# Altium PCB Fly_2_0425p1.PcbDoc (part 2 of 2)
Units mil, origin at the board's own origin, x right, y up, seen from the top; angles counter-clockwise.
Board outline 6426 x 1969.5 mil, 4 copper layers (TOP, GND02, PWR03, BOTTOM), stack 28.8 mil thick; 153 components, 128 nets, 741 pads, 411 vias.
Unrouted connection lines stored in the file: 3.
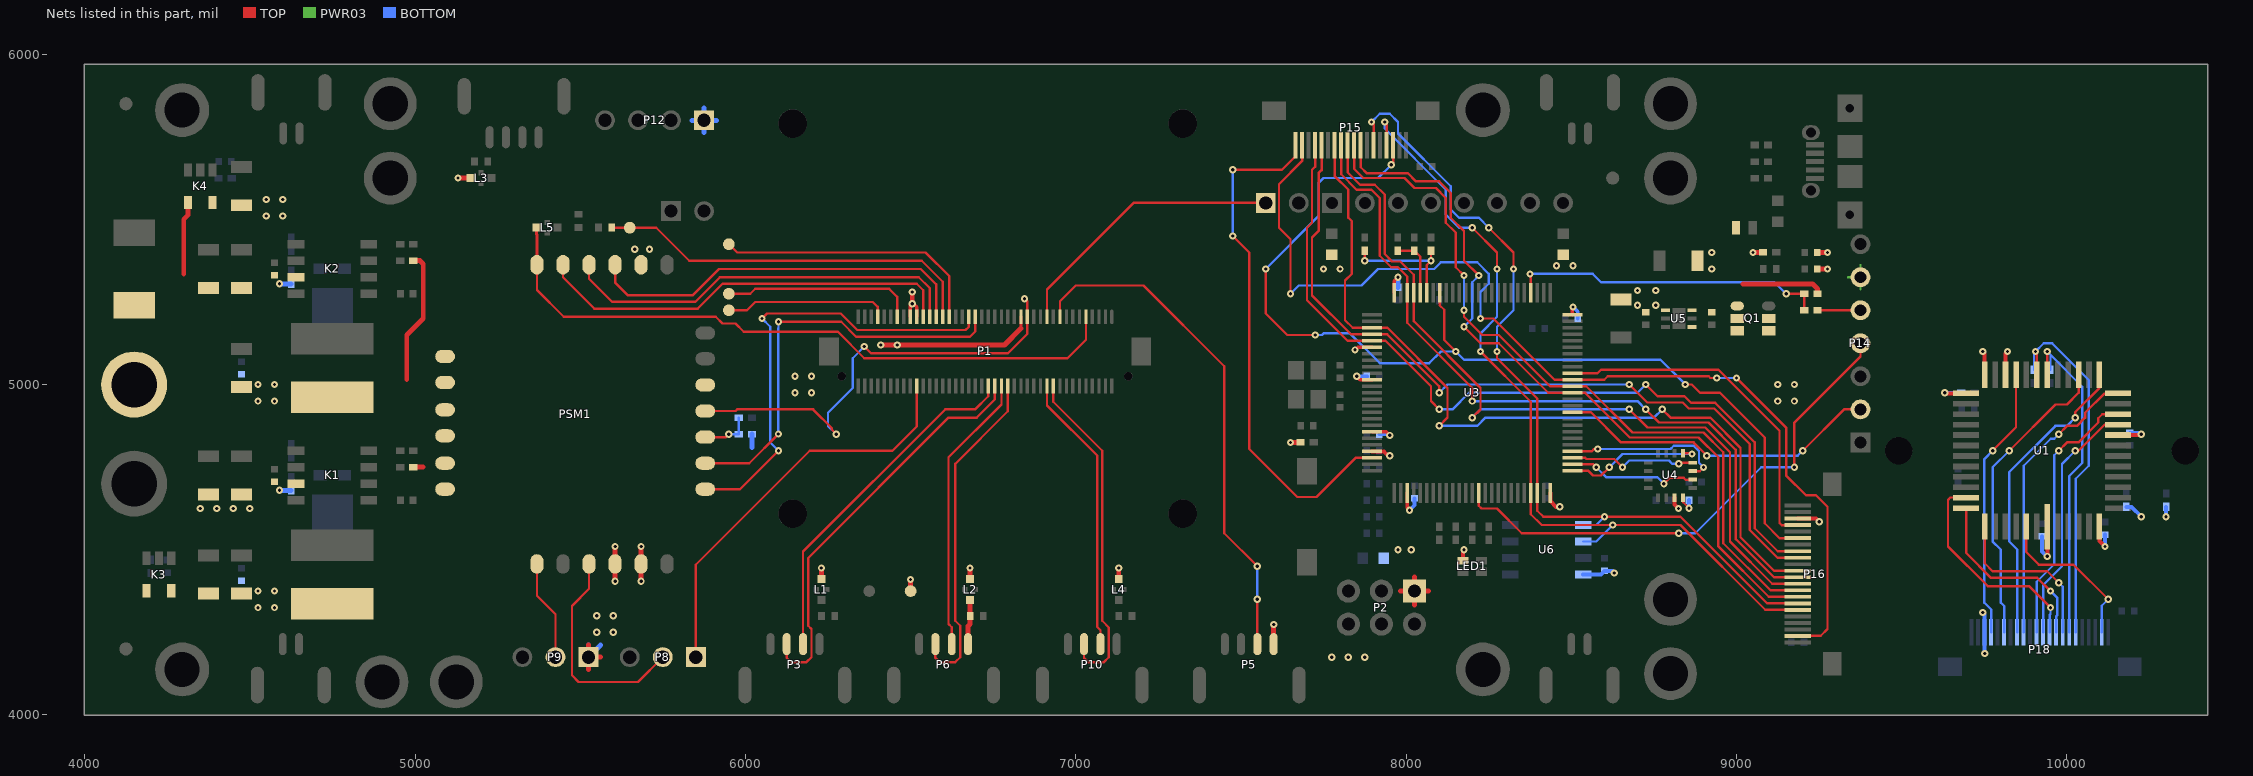
[diagram p4: the nets of this part, all layers, seen from the top]

## Via types
v1: diameter 22, hole 10, TOP to BOTTOM, 411 vias

## Nets (pads, with @x,y where several pads share a name; then routed paths per layer and width w, separated by ;. In a path a pad name is that pad's centre, name@x,y a point inside that pad or via, vN(x,y) a via of type N, cw(c..) or ccw(c..) an arc to the next point about the centre after c; other vN are vias at no path point) (continued)
PB7_DCMI_VSYNC: P15.3 P16.17 P18.17 U1.21 U3.93 | length 3964.5
  TOP w7: v1(7575,5350) 7575,5215 7640,5150 v1(7725,5150) ; v1(7955,5665) 7960.63,5670.63 P15.3@7960.63,5725 ; U3.93@8101.57,5278.15 8101.57,5239.65 8115,5226.23 8115,5135 v1(8150,5100) ; v1(8845,5000) 8864.5,5000 8889.5,4975 8950,4975 9085,4840 9085,4580 9130.04,4534.96 P16.17@9185,4534.96 ; v1(9825,4800) 9965,4940 10000,4940 10035.24,4975.24 U1.21@10035.24,5029.92
  BOTTOM w7: v1(7575,5350) 7735,5510 7735,5610 7750,5625 7915,5625 v1(7955,5665) ; v1(7725,5150) 7745,5150 7750,5155 7830,5155 7920,5065 8070,5065 8105,5100 v1(8150,5100) 8175,5075 8770,5075 v1(8845,5000) ; P18.17@9810.04,4250 9810.04,4329.96 9800,4340 9800,4500 9775,4525 9775,4750 v1(9825,4800)
PB8_I2C1_SCL: R22.2 R30.2 U3.95 | length 362.1
  TOP w7: v1(7875,5375) R30.2@7875,5405 ; U3.95@8062.2,5278.15 8062.2,5362.2 v1(8075,5375) R22.2@8075,5405
  BOTTOM w7: v1(7875,5375) v1(8075,5375)
PB9_I2C1_SDA: R23.2 R31.2 U3.96 | length 184.1
  TOP w7: R31.2@7975,5405 R23.2@8025,5405 8042.52,5387.48 U3.96@8042.52,5278.15
PB10_I2C2_SCL: P15.4 P16.6 P18.6 R15.2 U1.25 U3.47 U6.6 | length 3672.2
  TOP w7: v1(7935,5795) 7940.94,5789.06 P15.4@7940.94,5725 ; v1(8200,5475) 8275,5400 v1(8275,5350) ; v1(8225,5100) 8377.17,4947.84 U3.47@8377.17,4671.85 8377.17,4607.84 8410,4575 v1(8625,4575) 8830,4575 9086.57,4318.43 P16.6@9185,4318.43 ; v1(9905,5100) 9909,5096 U1.25@9909,5029.92
  BOTTOM w7: v1(7935,5795) 7935,5775 8120,5590 8120,5515 8160,5475 v1(8200,5475) ; v1(8225,5100) 8225,5155 8275,5205 v1(8275,5350) ; U6.6@8535.24,4525 8575,4525 v1(8625,4575) ; R15.2@9900,5045 9900,5095 v1(9905,5100) 9930,5125 9955,5125 10065.94,5014.06 10065.94,4754.46 10026.57,4715.09 P18.6@10026.57,4250
PB11_I2C2_SDA: P15.6 P16.7 P18.7 R16.2 U1.24 U3.48 U6.5 | length 3606.4
  TOP w7: v1(7895,5795) 7901.57,5788.43 P15.6@7901.57,5725 ; v1(8250,5475) 8325,5400 v1(8325,5350) ; v1(8275,5100) 8275,5080 8396.85,4958.15 U3.48@8396.85,4671.85 8396.85,4618.35 8415.2,4600 v1(8600,4600) 8830,4600 9091.89,4338.11 P16.7@9185,4338.11 ; v1(9940,5100) 9940,5080.5 9940.75,5079.75 U1.24@9940.75,5029.92
  BOTTOM w7: v1(7895,5795) 7920,5820 7950,5820 7975,5795 7975,5760 8135,5600 8135,5530 8160,5505 8220,5505 v1(8250,5475) ; v1(8275,5100) 8275,5175 8325,5225 v1(8325,5350) ; U6.5@8535.24,4575 8575,4575 v1(8600,4600) ; v1(9940,5100) 9950,5090 ; R16.2@9950,5045 9950,5090 ; P18.7@10006.89,4250 10006.89,4723.25 10046.26,4762.62 10046.26,4993.74 9950,5090
PB12_SPI2_NSS: U3.51 U4.5 | length 421.9
  TOP w7: U3.51@8503.15,4738.78 8551.72,4738.78 8565.5,4725 8590,4725 v1(8615,4750) ; U4.5@8838.39,4791.93 8863.07,4791.93 v1(8865,4790)
  BOTTOM w7: v1(8615,4750) 8655,4790 v1(8865,4790)
PB13_SPI2_SCK: U3.52 U4.2 | length 397.5
  TOP w7: U3.52@8503.15,4758.47 8566.53,4758.47 v1(8575,4750) ; v1(8780,4700) 8797.63,4717.63 8840,4717.63 8845.43,4712.2 U4.2@8866.93,4712.2
  BOTTOM w7: v1(8575,4750) 8605,4720 8760,4720 v1(8780,4700)
PB14_SPI2_MISO: U3.53 U4.4 | length 389.3
  TOP w7: U3.53@8503.15,4778.15 8541.65,4778.15 8544.8,4775 8630,4775 v1(8655,4750) ; v1(8825,4760) 8828.39,4763.39 U4.4@8866.93,4763.39
  BOTTOM w7: v1(8655,4750) 8675,4770 8795.5,4770 8805.5,4760 v1(8825,4760)
PB15_SPI2_MOSI: U3.54 U4.3 | length 489.9
  TOP w7: U3.54@8503.15,4797.84 8561.53,4797.84 8568.7,4805 v1(8580,4805) ; U4.3@8866.93,4737.8 8888.43,4737.8 v1(8900,4749.37)
  BOTTOM w7: v1(8580,4805) 8800,4805 8810,4815 8870,4815 8886.21,4798.79 8886.21,4763.16 v1(8900,4749.37)
PC6_DCMI_D0: P15.8 P16.8 P18.8 U1.43 U3.63 | length 2852.2
  TOP w7: P15.8@7862.2,5725 7862.2,5657.8 7880,5640 8005,5640 8030,5615 8100,5615 8135,5580 8135,5505 8175,5465 8175,5375 v1(8220,5330) ; v1(8175,5175) 8225,5125 8280,5125 8430,4975 U3.63@8503.15,4975 8541.65,4975 8676.65,4840 8885,4840 8945,4780 8945,4510 9097.2,4357.8 P16.8@9185,4357.8 ; U1.43@9751,4570 9751,4459 9775,4435 9940,4435 v1(9975,4400)
  BOTTOM w7: v1(8175,5175) 8200,5200 8200,5310 v1(8220,5330) ; v1(9975,4400) 9987.2,4387.8 P18.8@9987.2,4250
PC7_DCMI_D1: P15.9 P16.9 P18.9 U1.42 U3.64 | length 2856.4
  TOP w7: P15.9@7842.52,5725 7842.52,5652.48 7870,5625 7995,5625 8025,5595 8090,5595 8120,5565 8120,5490 8150,5460 8150,5355 v1(8175,5330) ; v1(8175,5225) 8175,5205.5 8230.5,5150 8280,5150 8435.32,4994.69 U3.64@8503.15,4994.69 8545.31,4994.69 8685,4855 8900,4855 8960,4795 8960,4520 9102.52,4377.48 P16.9@9185,4377.48 ; U1.42@9695,4626 9695,4490 9770,4415 9910,4415 v1(9950,4375)
  BOTTOM w7: v1(8175,5225) v1(8175,5330) ; v1(9950,4375) 9971,4354 9971,4301.98 9967.52,4298.5 P18.9@9967.52,4250
PC8_TIM8_CH3_MASTERCLOCK: P15.17 P16.2 P18.2 U1.47 U3.65 | length 3633.4
  TOP w7: v1(7650,5275) 7650,5440 7615,5475 7615,5606.46 7685.04,5676.5 P15.17@7685.04,5725 ; v1(8225,5200) 8263.39,5200 8449.01,5014.37 U3.65@8503.15,5014.37 8599.37,5014.37 8610,5025 8915.5,5025 8920.5,5020 v1(8940,5020) ; v1(9000,5020) 9150,4870 9150,4725 9210,4665 9240,4665 9275,4630 9275,4260 9254.69,4239.69 P16.2@9185,4239.69 ; U1.47@9877,4570 9877,4493 9915,4455 10020,4455 v1(10125,4350)
  BOTTOM w7: v1(7650,5275) 7675,5300 7865,5300 7915,5350 8085,5350 8105,5370 8215,5370 8250,5335 8250,5305 8225,5280 v1(8225,5200) ; v1(8940,5020) v1(9000,5020) ; P18.2@10105.31,4250 10105.31,4330.31 v1(10125,4350)
PC9_TIM8_CH4_LED_OUT: P16.19 P18.19 U1.27 U3.66 | length 1873.1
  TOP w7: U3.66@8503.15,5034.06 8579.06,5034.06 8590,5045 8945,5045 9130,4860 9130,4580.83 9136.5,4574.33 P16.19@9185,4574.33 ; v1(9775,4800) 9846,4871 U1.27@9846,5029.92
  BOTTOM w7: P18.19@9770.67,4250 9770.67,4319.33 9750,4340 9750,4775 v1(9775,4800)
PE0_DCMI_D2: P15.10 P16.10 P18.10 U1.41 U3.97 | length 3076.5
  TOP w7: P15.10@7822.83,5725 7822.83,5642.17 7860,5605 7905,5605 7935,5575 7935,5395 7957.32,5372.68 7982.32,5372.68 8022.84,5332.16 U3.97@8022.84,5278.15 8022.84,5192.16 8225,4990 8225,4925 v1(8200,4900) ; v1(8675,4925) 8730,4870 8905,4870 8980,4795 8980,4525 9107.83,4397.17 P16.10@9185,4397.17 ; U1.41@9695,4658 9647,4658 9640,4651 9640,4510 9760,4390 9885,4390 v1(9950,4325)
  BOTTOM w7: v1(8200,4900) 8225,4925 v1(8675,4925) ; P18.10@9947.83,4250 9947.83,4303.33 9950,4305.5 v1(9950,4325)
PE1_DCMI_D3: P15.11 P16.11 P18.11 U1.15 U3.98 | length 3094.1
  TOP w7: P15.11@7803.15,5725 7803.15,5636.85 7850,5590 7895,5590 7920,5565 7920,5390 7955,5355 7975,5355 8003.15,5326.85 U3.98@8003.15,5278.15 8003.15,5186.85 8200,4990 v1(8200,4950) ; v1(8725,4925) 8765,4885 8915,4885 8997.68,4802.32 8997.68,4532.32 9113.15,4416.85 P16.11@9185,4416.85 ; v1(10025,4800) 10035,4800 10113.74,4878.74 U1.15@10154.92,4878.74
  BOTTOM w7: v1(8200,4950) 8700,4950 v1(8725,4925) ; P18.11@9928.15,4250 9928.15,4393.15 9985,4450 9985,4760 v1(10025,4800)
PE4_DCMI_D4: P15.12 P16.12 P18.12 U1.16 U3.3 | length 3357
  TOP w7: P15.12@7783.46,5725 7783.46,5631.54 7825,5590 7825,5505 7835,5495 7835,5335 7815,5315 7815,5195 7838.15,5171.85 U3.3@7896.85,5171.85 7943.15,5171.85 8125,4990 8125,4900 v1(8100,4875) ; v1(8775,4925) 8800,4900 8920,4900 9011.82,4808.18 9011.82,4538.18 9113.46,4436.54 P16.12@9185,4436.54 ; v1(9975,4800) 10000,4825 10035,4825 10095,4885 10095,4898.32 10106.92,4910.24 U1.16@10154.92,4910.24
  BOTTOM w7: v1(8100,4875) 8215,4875 8240,4900 8750,4900 v1(8775,4925) ; P18.12@9908.46,4250 9908.46,4403.46 9961.21,4456.21 9961.21,4786.21 v1(9975,4800)
PE5_DCMI_D6: P15.14 P16.14 P18.14 U1.18 U3.4 | length 3339.9
  TOP w7: P15.14@7744.09,5725 7744.09,5649.09 7735,5640 7735,5465 7715,5445 7715,5270 7832.84,5152.16 U3.4@7896.85,5152.16 7942.34,5152.16 8100,4994.5 v1(8100,4975) ; v1(8675,5000) 8729.5,4945.5 8837.38,4945.5 8855.38,4927.5 8932.5,4927.5 9040,4820 9040,4560 9124.09,4475.91 P16.14@9185,4475.91 ; v1(9975,4850) 10000,4875 10030,4875 10055,4900 10055,4915 10113.23,4973.23 U1.18@10154.92,4973.23
  BOTTOM w7: v1(8100,4975) 8125,5000 v1(8675,5000) ; P18.14@9869.09,4250 9869.09,4754.09 9951.21,4836.21 9961.21,4836.21 v1(9975,4850)
PE6_DCMI_D7: P15.15 P16.15 P18.15 U1.19 U3.5 | length 3444.2
  TOP w7: P15.15@7724.41,5725 7724.41,5659.41 7715,5650 7715,5490 7700,5475 7700,5255 7822.52,5132.48 U3.5@7896.85,5132.48 7937.52,5132.48 8075,4995 8075,4950 v1(8100,4925) ; v1(8725,5000) 8760.5,4964.5 8842.54,4964.5 8862.05,4945 8935,4945 9055,4825 9055,4565 9124.41,4495.59 P16.15@9185,4495.59 ; v1(10025,4900) 10025,4916.77 10098.23,4990 U1.19@10098.23,5029.92
  BOTTOM w7: v1(8100,4925) 8140,4925 8190,4975 8700,4975 v1(8725,5000) ; P18.15@9849.41,4250 9849.41,4500.59 9825,4525 9825,4735 9965,4875 10000,4875 v1(10025,4900)
PERIPH_5V: D2.C L2.2 P6.1 | length 136.3
  TOP w15: P6.1@6673.82,4214.57 6673.82,4268.82 6680,4275 6680,4279.18 6680.32,4279.5 D2.C@6680.32,4300 6680.32,4320.5 6680,4320.82 L2.2@6680,4348
PPM-SBUS-PROT: P1.62 P8.1 | length 1243.9
  TOP w7: P8.1@5850,4175 5850,4455 6195,4800 6445,4800 6518.31,4873.31 P1.62@6518.31,4995.67
PRESSURE_SENS_IN: P1.21 P4.1 | length 853.5
  TOP w7: P1.21@6913,5205 6913,5288 7175,5550 P4.1@7575,5550
PWDN: P15.18 U3.23 | length 1587.9
  TOP w7: v1(7475,5450) 7525,5400 7525,4805 7670,4660 7728.7,4660 7846.85,4778.15 U3.23@7896.85,4778.15 ; v1(7475,5650) 7624.35,5650 7665.35,5691.01 P15.18@7665.35,5725
  BOTTOM w7: v1(7475,5450) v1(7475,5650)
PWM: P14.2 U3.60 | length 984.1
  TOP w7: U3.60@8503.15,4915.94 8559.06,4915.94 8650,4825 8870,4825 v1(8910,4785) ; v1(9200,4800) 9325,4925 P14.2@9375,4925
  BOTTOM w7: v1(8910,4785) 9185,4785 v1(9200,4800)
RX_5V0_OUT: P8.2 PSM1.3 | length 672.9
  TOP w7: PSM1.3@5526.87,4457.09 5526.87,4381.87 5475,4330 5475,4120 5495,4100 5675,4100 P8.2@5750,4175
SAFETY: P1.17 P5.2 | length 1548.1
  TOP w7: P1.17@6952,5205 6952,5252 7000,5300 7205,5300 7449.61,5055.39 7449.61,4550 v1(7549.61,4450) ; P5.2@7549.61,4214.57 v1(7549.61,4350)
  BOTTOM w7: v1(7549.61,4350) v1(7549.61,4450)
SERIAL1_RX: P1.38 P3.3 | length 1237.1
  TOP w7: P3.3@6125,4214.57 6125,4172.57 6137.57,4160 6185,4160 6200,4175 6200,4260 6190,4270 6190,4475 6615,4900 6700,4900 6755,4955 P1.38@6755,4995.67
SERIAL1_TX: P1.40 P3.2 | length 1065.9
  TOP w7: P3.2@6174.61,4214.57 6174.61,4494.61 6605,4925 6695,4925 6735,4965 P1.40@6735,4995.67
SERIAL2_RX: P1.34 P6.3 | length 1021.2
  TOP w7: P6.3@6575,4214.57 6575,4172.57 6587.57,4160 6635,4160 6650,4175 6650,4270 6635,4285 6635,4760 6794,4919 P1.34@6794,4995.67
SERIAL2_TX: P1.36 P6.2 | length 851.4
  TOP w7: P6.2@6624.61,4214.57 6624.61,4265.39 6615,4275 6615,4780 6775,4940 P1.36@6775,4995.67
SERIAL3_RX: P1.20 P10.3 | length 1018.7
  TOP w7: P1.20@6932,4995.67 6932,4948 7080,4800 7080,4285 7100,4265 7100,4175 7085,4160 7037.57,4160 7025,4172.57 P10.3@7025,4214.57
SERIAL3_TX: P1.22 P10.2 | length 848
  TOP w7: P1.22@6913,4995.67 6913,4937 7065,4785 7065,4266.18 7074.61,4256.57 P10.2@7074.61,4214.57
SONAR_TX: P14.5 R19.2 | length 130
  TOP w7: R19.2@9245,5225 P14.5@9375,5225
SPI_EXT_MISO: P1.67 S3.1 | length 586.3
  TOP w7: S3.1@5950,5275 6015,5275 6030,5290 6435,5290 6459.25,5265.75 P1.67@6459.25,5205
SPI_EXT_MOSI: P1.51 S2.1 | length 830.1
  TOP w7: S2.1@5950,5425 5975,5400 6545,5400 6616.73,5328.27 P1.51@6616.73,5205
SPI_EXT_SCK: P1.73 S4.1 | length 497.1
  TOP w7: S4.1@5950,5225 6005,5225 6030,5250 6385.7,5250 6400.2,5235.5 P1.73@6400.2,5205
UART4_RX: R17.2 R19.1 U3.79 | length 962.6
  TOP w7: v1(8375,5335) 8377.17,5332.84 U3.79@8377.17,5278.15 ; v1(9150,5275) R17.2@9205,5275 R19.1@9205,5225
  BOTTOM w7: v1(8375,5335) 8565,5335 8590,5310 9115,5310 v1(9150,5275)
US_FN1: P14.4 U3.39 | length 1569
  TOP w7: U3.39@8219.68,4671.85 8219.68,4633.35 8228.03,4625 8275,4625 8350,4550 v1(8825,4550) ; v1(9175,4750) 9175,4885 9375,5085 P14.4@9375,5125
  BOTTOM w7: v1(8825,4550) 8875,4550 9075,4750 v1(9175,4750)
VBAT: C2.1 C3.1 C4.1 C9.1 C10.1 C11.1 K1.7 K2.7 K3.4 K4.4 P13.1 R3.1 R7.2 R11.2 | length 291
  TOP w15: 4300,5335 4300,5500 4312.6,5512.6 K4.4@4312.6,5550.79
  BOTTOM w15: v1(4590,4680) R7.2@4625,4680 ; v1(4590,5305) R11.2@4625,5305
  other v1: 4350,4625 4400,4625 4450,4625 4500,4625
VBUS: P1.29 P12.1 PSM1.11 PSM1.20 PSM1.21 | length 627.7
  TOP w10: 6834,5170 P1.29@6834,5205
  TOP w15: v1(6410,5120) v1(6460,5120) 6784,5120 6834,5170
  BOTTOM w15: 5838,5800 P12.1@5875,5800 ; 5875,5763 P12.1@5875,5800 ; 5875,5837 P12.1@5875,5800 ; 5912,5800 P12.1@5875,5800
  other v1: 6150,4975 6200,4975 6150,5025 6200,5025
VBUS_VALID: P1.59 PSM1.18 | length 1286.8
  TOP w7: PSM1.18@5448,5362.6 5448,5324.57 5542.57,5230 5855.68,5230 5930.68,5305 6518.49,5305 6537.99,5285.5 P1.59@6537.99,5205
VDD_3V3_FLOW: C17.1 C18.1 C19.1 C24.1 C25.1 C26.1 C36.1 C37.1 C40.2 C41.2 C42.2 C43.2 C44.2 C50.1 L9.2 L11.2 LED1.4 P14.6 P16.20 P18.20 R14.2 R18.2 R20.2 R25.1 R27.2 U1.1 U1.6 U1.14 U1.28 U1.30 U1.31 U3.6 U3.11 U3.19 U3.22 U3.28 U3.50 U3.75 U3.100 U4.15 U4.16 U5.1 U6.8 | length 1974.1
  TOP w7: U4.16@8838.39,4658.07 8838.39,4643.61 v1(8856,4626)
  TOP w10: v1(7845,5105) 7852.8,5112.8 U3.6@7896.85,5112.8 ; v1(7850,5025) 7850,5024.37 7860,5014.37 U3.11@7896.85,5014.37 ; U3.19@7896.85,4856.89 7939.35,4856.89 v1(7950,4846.24) ; U3.100@7963.78,5278.15 7963.78,5313.78 v1(7975,5325)
  TOP w11: U3.28@8003.15,4671.85 8003.15,4626.85 v1(8010,4620) ; U3.75@8503.15,5211.22 8503.15,5233.15 v1(8505,5235)
  TOP w12: U3.22@7896.85,4797.84 7932.16,4797.84 7945,4785 v1(7950,4785) ; LED1.4@8171.46,4466.73 8171.46,4496.46 v1(8175,4500) ; U3.50@8436.22,4671.85 8436.22,4647.35 8453.57,4630 v1(8465,4630) ; U4.15@8812.8,4658.07 8812.8,4636.57 v1(8824.37,4625) ; P16.20@9185,4594.02 9240.98,4594.02 v1(9250,4585) ; v1(9630,4975) 9631.77,4973.23 U1.31@9695,4973.23 ; v1(9745,5100) 9751,5094 U1.30@9751,5029.92 ; U1.28@9814,5029.92 9814,5094 v1(9820,5100) ; v1(9940,4480) 9940.75,4480.75 9940.75,4515.75 U1.1@9940.75,4570 ; U1.6@10098.23,4570 10098.23,4526.77 v1(10115,4510) ; U1.14@10154.92,4847.24 10222.24,4847.24 v1(10225,4850)
  TOP w15: v1(7650,4825) R25.1@7680,4825 ; v1(9050,5400) R27.2@9080,5400 ; C24.1@9244,5350 v1(9275,5350) ; C25.1@9244,5400 v1(9275,5400)
  PWR03 w7: 9338,5325 P14.6@9375,5325 ; 9375,5288 P14.6@9375,5325 ; 9375,5362 P14.6@9375,5325
  BOTTOM w11: v1(8010,4620) 8025,4635 C43.2@8025,4656 ; v1(8505,5235) 8519,5221 C42.2@8519,5200
  BOTTOM w12: v1(7850,5025) C44.2@7881,5025 ; C40.2@7919,4850 7946.24,4850 v1(7950,4846.24) ; U6.8@8535.24,4425 8589,4425 C50.1@8600,4436 8624,4436 v1(8630,4430) ; v1(8856,4626) C26.1@8856,4650 ; v1(9630,4975) R14.2@9680,4975 ; v1(9745,4310) 9750.98,4304.02 P18.20@9750.98,4250 v1(9750.98,4185.98) ; C19.1@9925,4541 9925,4495 v1(9940,4480) ; v1(10115,4510) C17.1@10115,4546 ; R18.2@10180,4630 10195,4630 v1(10225,4600) ; C18.1@10190,4854 10221,4854 v1(10225,4850) ; v1(10300,4600) R20.2@10300,4630
  BOTTOM w15: C41.2@7975,5294 v1(7975,5325)
  other v1: 7975,4500 8015,4500 8700,5240 8755,5240 8700,5285 8755,5285 8455,5360 8505,5360
VDD_3V3_USER: P9.2 PSM1.1 | length 305.3
  TOP w7: PSM1.1@5369,4457.09 5369,4361 5425,4305 P9.2@5425,4175
VDD_3V3_USER_EN: PSM1.9 R1.1 R2.2 | length 155.2
  TOP w7: PSM1.9@5878.54,4840.94 5940.94,4840.94 v1(5950,4850)
  BOTTOM w7: v1(5950,4850) R1.1@5980,4850 R2.2@5980,4900
VDD_5V_BACKUP: C14.1 C15.1 C16.1 K4.5 L7.2 PSM1.22 PSM1.23 R10.1 | length 404.9
  TOP w15: 4975,5015 4975,5150 5025,5200 5025,5365 5015,5375 R10.1@4995,5375
  other v1: 4525,4950 4575,4950 4525,5000 4575,5000 4550,5510 4600,5510 4550,5560 4600,5560
VDD_5V_BRICK: C6.1 C7.1 C8.1 K3.5 L6.2 PSM1.24 PSM1.25 R5.1 | length 30
  TOP w15: R5.1@4995,4750 5025,4750
  other v1: 4525,4325 4575,4325 4525,4375 4575,4375
VDD_5V_FLOW: C38.1 C39.1 D8.2 L10.2 Q1.4 R17.1 U5.4 U5.6 | length 246.2
  TOP w15: 9020,5305 9230,5305 9245,5290 R17.1@9245,5275
  other v1: 7750,5350 7800,5350 8925,5350 8925,5400
VDD_5V_HIPOWER: P9.1 PSM1.5 Q1.1 Q1.2 Q1.5 Q1.6 | length 305.3
  TOP w15: 5525,4138 P9.1@5525,4175 ; 5525,4212 P9.1@5525,4175 ; 5562,4175 P9.1@5525,4175 ; v1(5684.35,4405) PSM1.5@5684.35,4457.09 v1(5684.35,4510)
  BOTTOM w15: 5525,4212 P9.1@5525,4175 5562,4212
  other v1: 5550,4250 5600,4250 5550,4300 5600,4300 9125,4950 9175,4950 9125,5000 9175,5000
VDD_5V_HIPOWER_OC: P1.45 PSM1.7 | length 1377.6
  TOP w7: PSM1.7@5878.54,4683.46 5983.46,4683.46 v1(6100,4800) ; v1(6050,5200) 6065,5215 6288.28,5215 6338.28,5165 6666.29,5165 6675.79,5174.5 P1.45@6675.79,5205
  BOTTOM w7: v1(6050,5200) 6075,5175 6075,4825 v1(6100,4800)
VDD_5V_IN_PROT: P1.61 P1.63 PSM1.15 R1.2 | length 165.1
  TOP w10: P1.63@6498.62,5205 6498.62,5238.62 v1(6505,5245) 6508.31,5245 6518.31,5235 P1.61@6518.31,5205
  TOP w15: v1(6505,5245) v1(6505,5280)
  BOTTOM w15: 6020,4810 R1.2@6020,4850
  other v1: 5665,5410 5710,5410
VDD_5V_PERIPH: L1.1 L2.1 L3.1 L4.1 P2.1 P5.1 PSM1.4 S1.1 | length 506.3
  TOP w15: v1(5130,5625) L3.1@5168.5,5625 ; v1(5605.61,4405) PSM1.4@5605.61,4457.09 v1(5605.61,4510) ; L1.1@6230,4411.5 v1(6230,4445) ; S1.1@6500,4375 v1(6500,4410) ; L2.1@6680,4411.5 v1(6680,4445) ; L4.1@7130,4411.5 v1(7130,4445) ; P5.1@7598.82,4214.57 v1(7598.82,4273.82) ; 7983,4375 P2.1@8025,4375 ; 8025,4333 P2.1@8025,4375 ; 8025,4417 P2.1@8025,4375 ; 8067,4375 P2.1@8025,4375
  other v1: 7775,4175 7825,4175 7875,4175
VDD_5V_PERIPH_EN: P1.27 PSM1.10 | length 1389.1
  TOP w7: PSM1.10@5878.54,4920 5970,4920 5975,4925 6205,4925 6261.21,4868.79 6261.21,4863.79 v1(6275,4850) ; v1(6360,5115) 6380,5095 6795,5095 6853,5153 P1.27@6853,5205 6853,5252 v1(6845,5260)
  BOTTOM w7: v1(6275,4850) 6250,4875 6250,4915 6325,4990 6325,5080 v1(6360,5115)
VDD_5V_PERIPH_OC: P1.43 PSM1.8 | length 1262.7
  TOP w7: PSM1.8@5878.54,4762.2 6011.92,4762.2 v1(6099.86,4850.14) ; v1(6100,5190) 6290,5190 6335,5145 6680,5145 6695.47,5160.47 P1.43@6695.47,5205
  BOTTOM w7: v1(6099.86,4850.14) 6099.86,5170.36 6100,5170.5 v1(6100,5190)
VDD_BACKUP_VALID: P1.57 PSM1.17 | length 1233.9
  TOP w7: PSM1.17@5526.87,5362.6 5526.87,5320.3 5596.85,5250.32 5848.15,5250.32 5922.83,5325 6525,5325 6557.68,5292.32 P1.57@6557.68,5205
VDD_BRICK_VALID: P1.55 PSM1.16 | length 1192.1
  TOP w7: PSM1.16@5605.61,5362.6 5605.61,5309.39 5645,5270 5840,5270 5920,5350 6530.68,5350 6577.36,5303.32 P1.55@6577.36,5205
VDD_SERVO: D300.A P1.53 S6.1 | length 1176.3
  TOP w7: D300.A@5595,5475 S6.1@5650,5475 5730,5475 5830,5375 6533.52,5375 6597.05,5311.47 P1.53@6597.05,5205
VDD_SERVO_IN: L5.2 P1.9 PSM1.19 | length 2028.9
  TOP w7: PSM1.19@5369,5362.6 5369,5286 5450,5205 5910,5205 5930.27,5184.73 5970.27,5184.73 5995,5160 6280,5160 6360,5080 6975,5080 7031,5136 P1.9@7031,5205
  TOP w10: L5.2@5368,5475 5368,5454.5 5369,5453.5 PSM1.19@5369,5362.6
pads on no net: "P1. " "P15. " "P16. " "P18. " K1.2 K1.3 K1.5 K2.2 K2.3 K2.5 N5.GND N5.GND/2 N6.GND N6.GND/2 N7.GND N7.GND/2 N8.GND N8.GND/2 P1.2 P1.5 P1.7 P1.8 P1.10 P1.11 P1.12 P1.14 P1.16 P1.18 P1.19 P1.26 P1.30 P1.32 P1.35 P1.37 P1.42 P1.44 P1.46 P1.48 P1.50 P1.52 P1.54 P1.56 P1.58 P1.60 P1.64 P1.65 P1.66 P1.68 P1.70 P1.72 P1.75 P1.77 P1.79 P14.1 PSM1.2 U1.2 U1.3 U1.4 U1.5 U1.22 U1.26 U1.36 U1.37 U1.44 U1.45 U2.1 U2.2 U3.7 U3.8 U3.9 U3.16 U3.17 U3.18 U3.24 U3.32 U3.33 U3.34 U3.35 U3.36 U3.40 U3.41 U3.42 U3.43 U3.44 U3.45 U3.46 U3.55 U3.56 U3.57 U3.58 U3.59 U3.61 U3.62 U3.67 U3.77 U3.78 U3.80 U3.81 U3.82 U3.83 U3.84 U3.85 U3.86 U3.87 U3.88 U3.89 U3.90 U3.91 U4.6 U4.7 U5.2 U5.5 U6.7
copper on no net: | length 1109.1
  TOP w12: 4070,4175 4070,4225 4100,4255 4150,4255 4180,4225 4180,4175 4150,4145 4100,4145 4070,4175 ; 4070,5825 4070,5875 4100,5905 4150,5905 4180,5875 4180,5825 4150,5795 4100,5795 4070,5825 ; 8570,5600 8570,5650 8600,5680 8650,5680 8680,5650 8680,5600 8650,5570 8600,5570 8570,5600

## Polygon pours and split planes (outlines as drawn)
VDD_5V_PERIPH on TOP "TOP-VDD_5V_PERIPH" (solid, pour order 2): 106 vertices, not listed, extent 7735,4130 8090,4425
VDD_5V_IN_PROT on TOP "TOP-VDD_5V_IN_PROT" (solid, pour order 6): 5650,5430 5660,5440 5715,5440 5725,5430 5725,5325 5715,5315 5660,5315 5650,5325 5650,5430
VDD_5V_HIPOWER on TOP "TOP-VDD_5V_HIPOWER" (solid, pour order 10): 18 vertices, not listed, extent 5495,4120 5725,4525
VDD_5V_HIPOWER on TOP "TOP-VDD_5V_HIPOWER 1" (solid, pour order 12): 9185,4920 9130,4920 8970,5080 8970,5198.78 8981.21,5210 9021.21,5210 9026.22,5215 9130,5215 9205,5140 9205,4940 9185,4920
VDD_5V_FLOW on TOP "TOP-VDD_5V_FLOW" (solid, pour order 16): 7805,5330 7745,5330 7735,5340 7735,5405 7745,5415 7805,5415 7815,5405 7815,5340 7805,5330
VDD_5V_FLOW on TOP "TOP-VDD_5V_FLOW 1" (solid, pour order 18): 32 vertices, not listed, extent 8850,5160 9025,5495
VDD_5V_BRICK on TOP "TOP-VDD_5V_BRICK" (solid, pour order 22): 18 vertices, not listed, extent 4230,4265 5145,4795
VDD_5V_BACKUP on TOP "TOP-VDD_5V_BACKUP" (solid, pour order 26): 5050,4950 5125,4950 5140,4935 5140,4830 5125,4815 5045,4815 5035,4825 4950,4825 4900,4875 4425,4875 4400,4900 4400,5010 4415,5025 4975,5025 5050,4950
VDD_5V_BACKUP on TOP "TOP-VDD_5V_BACKUP 1" (solid, pour order 28): 4625,5570 4625,5505 4615,5495 4360,5495 4350,5505 4350,5570 4360,5580 4615,5580 4625,5570
VDD_3V3_FLOW on TOP "TOP-VDD_3V3_FLOW" (solid, pour order 34): 8445,5350 8440,5355 8440,5410 8445,5415 8520,5415 8525,5410 8525,5355 8520,5350 8445,5350
VDD_3V3_FLOW on TOP "TOP-VDD_3V3_FLOW 1" (solid, pour order 36): 8780,5300 8795,5285 8795,5225 8790,5220 8765,5220 8755,5210 8620,5210 8610,5220 8610,5285 8625,5300 8780,5300
VBUS on TOP "TOP-VBUS" (solid, pour order 42): 18 vertices, not listed, extent 5025,4925 6215,5175
VBAT on TOP "TOP-VBAT" (solid, pour order 46): 20 vertices, not listed, extent 4050,4875 4685,5345
VBAT on TOP "TOP-VBAT 1" (solid, pour order 48): 32 vertices, not listed, extent 4040,4320 4685,4905
NETL11_1 on TOP "TOP-NETL11_1" (solid, pour order 50): 8435,5585 8445,5595 8515,5595 8525,5585 8525,5450 8515,5440 8450,5440 8435,5455 8435,5585
NETJ1_1 on TOP "TOP-NETJ1_1" (solid, pour order 52): 45 vertices, not listed, extent 9085,5540 9270,5635
NETD8_1 on TOP "TOP-NETD8_1" (solid, pour order 56): 9155,5435 9045,5435 9035,5445 9035,5505 9040,5510 9155,5510 9165,5500 9165,5445 9155,5435
NETC5_2 on TOP "TOP-NETC5_2" (solid, pour order 58): 4600,4450 4575,4475 4575,4625 4610,4660 4681.21,4660 4681.22,4660 4740,4660 4800,4600 4990,4600 5000,4590 5000,4465 4985,4450 4600,4450
NETC13_2 on TOP "TOP-NETC13_2" (solid, pour order 62): 4600,5075 4575,5100 4575,5250 4610,5285 4681.21,5285 4681.22,5285 4740,5285 4800,5225 4925,5225 4940,5210 4940,5090 4925,5075 4600,5075
GND on TOP "TOP-GND" (solid, pour order 68): 4320,4465 4320,4535 4330,4545 4515,4545 4525,4535 4525,4465 4515,4455 4330,4455 4320,4465
GND on TOP "TOP-GND 1" (solid, pour order 72): 4540,4735 4525,4750 4340,4750 4330,4760 4330,4835 4345,4850 4585,4850 4600,4835 4600,4745 4590,4735 4540,4735
GND on TOP "TOP-GND 2" (solid, pour order 76): 4515,5170 4525,5160 4525,5090 4515,5080 4435,5080 4425,5090 4425,5160 4435,5170 4515,5170
GND on TOP "TOP-GND 3" (solid, pour order 80): 26 vertices, not listed, extent 8610,5105 8835,5235
GND on TOP "TOP-GND 4" (solid, pour order 84): 4540,5360 4525,5375 4340,5375 4330,5385 4330,5460 4345,5475 4585,5475 4600,5460 4600,5370 4590,5360 4540,5360
GND on TOP "TOP-GND 5" (solid, pour order 86): 8790,5335 8785,5330 8720,5330 8715,5335 8715,5420 8720,5425 8785,5425 8790,5420 8790,5335
GND on TOP "TOP-GND 6" (solid, pour order 88): 4415,5705 4425,5715 4525,5715 4535,5705 4535,5635 4525,5625 4425,5625 4415,5635 4415,5705
GND on TOP "TOP-GND 7" (solid, pour order 90): 133 vertices, not listed, extent 9140,5470 9390,5835
BAT_ESC on TOP "TOP-BAT_ESC" (solid, pour order 96): 4105,4450 4105,4510 4115,4520 4190,4520 4200,4510 4200,4450 4190,4440 4115,4440 4105,4450
BAT_ESC on TOP "TOP-BAT_ESC 1" (solid, pour order 98): 4065,5700 4295,5700 4325,5670 4325,5620 4275,5570 4275,5425 4250,5400 4075,5400 4050,5425 4050,5685 4065,5700
AVDD_3V3_FLOW on TOP "TOP-AVDD_3V3_FLOW" (solid, pour order 104): 156 vertices, not listed, extent 9550,4185 10170,4860
AVDD_3V3_FLOW on TOP "TOP-AVDD_3V3_FLOW 1" (solid, pour order 110): 24 vertices, not listed, extent 9110,4155 9230,4225
VDD_5V_PERIPH on PWR03 "PWR03-VDD_5V_PERIPH" (solid, pour order 4): 368 vertices, not listed, extent 5000,4150 7900,5650
VDD_3V3_FLOW on PWR03 "PWR03-VDD_3V3_FLOW" (solid, pour order 32): 146 vertices, not listed, extent 9550,4100 10325,5125
VDD_3V3_FLOW on PWR03 "PWR03-VDD_3V3_FLOW 1" (solid, pour order 40): 1021 vertices, not listed, extent 7600,4425 9396.25,5500
BAT_ESC on PWR03 "PWR03-BAT_ESC" (solid, pour order 102): 359 vertices, not listed, extent 4025,4025 8875,5925
AVDD_3V3_FLOW on PWR03 "PWR03-AVDD_3V3_FLOW" (solid, pour order 116): 839 vertices, not listed, extent 7375,4150 9195,5725
VDD_5V_IN_PROT on BOTTOM "BOTTOM-VDD_5V_IN_PROT" (solid, pour order 8): 101 vertices, not listed, extent 5645,4725 6575,5440
VDD_5V_HIPOWER on BOTTOM "BOTTOM-VDD_5V_HIPOWER" (solid, pour order 14): 280 vertices, not listed, extent 5500,4195 9300,5025
VDD_5V_FLOW on BOTTOM "BOTTOM-VDD_5V_FLOW" (solid, pour order 20): 46 vertices, not listed, extent 7730,5325 8960,5450
VDD_5V_BRICK on BOTTOM "BOTTOM-VDD_5V_BRICK" (solid, pour order 24): 4600,4400 4600,4315 4585,4300 4460,4300 4440,4320 4440,4405 4450,4415 4585,4415 4600,4400
VDD_5V_BACKUP on BOTTOM "BOTTOM-VDD_5V_BACKUP" (solid, pour order 30): 224 vertices, not listed, extent 4400,4925 4625,5580
VDD_3V3_FLOW on BOTTOM "BOTTOM-VDD_3V3_FLOW" (solid, pour order 38): 7915,4445 7915,4510 7920,4515 8020,4515 8030,4505 8030,4450 8020,4440 7920,4440 7915,4445
VBUS on BOTTOM "BOTTOM-VBUS" (solid, pour order 44): 58 vertices, not listed, extent 5825,4960 6475,5850
NETD8_1 on BOTTOM "BOTTOM-NETD8_1" (solid, pour order 54): 37 vertices, not listed, extent 8880,5045 9245,5490
NETC5_2 on BOTTOM "BOTTOM-NETC5_2" (solid, pour order 60): 4635,4450 4625,4460 4625,4660 4626.5,4661.5 4641,4661.5 4641,4675 4900,4675 4920,4655 4920,4460 4910,4450 4635,4450
NETC13_2 on BOTTOM "BOTTOM-NETC13_2" (solid, pour order 64): 4635,5075 4625,5085 4625,5285 4626.5,5286.5 4641,5286.5 4641,5300 4900,5300 4920,5280 4920,5085 4910,5075 4635,5075
GND on BOTTOM "BOTTOM-GND" (solid, pour order 70): 4515,4545 4525,4535 4525,4445 4515,4435 4445,4435 4435,4445 4435,4535 4445,4545 4515,4545
GND on BOTTOM "BOTTOM-GND 1" (solid, pour order 74): 4675,4695 4660,4710 4660,4781.56 4664.5,4786.06 4664.5,4804.5 4670,4810 4835,4810 4845,4800 4845,4710 4830,4695 4675,4695
GND on BOTTOM "BOTTOM-GND 2" (solid, pour order 78): 4430,5060 4420,5070 4420,5160 4430,5170 4515,5170 4525,5160 4525,5070 4515,5060 4430,5060
GND on BOTTOM "BOTTOM-GND 3" (solid, pour order 82): 4675,5425 4685,5435 4820,5435 4830,5425 4830,5330 4820,5320 4685,5320 4675,5330 4675,5425
GND on BOTTOM "BOTTOM-GND 4" (solid, pour order 94): 48 vertices, not listed, extent 7915,4535 8000,4770
BAT_ESC on BOTTOM "BOTTOM-BAT_ESC" (solid, pour order 100): 324 vertices, not listed, extent 4025,4025 8896.25,5943.5
AVDD_3V3_FLOW on BOTTOM "BOTTOM-AVDD_3V3_FLOW" (solid, pour order 106): 35 vertices, not listed, extent 9560,4775 9975,4985
AVDD_3V3_FLOW on BOTTOM "BOTTOM-AVDD_3V3_FLOW 1" (solid, pour order 108): 10120,4195 10120,4325 10125,4330 10170,4330 10175,4325 10175,4195 10170,4190 10125,4190 10120,4195
AVDD_3V3_FLOW on BOTTOM "BOTTOM-AVDD_3V3_FLOW 2" (solid, pour order 112): 9110,4170 9110,4220 9120,4230 9170,4230 9175,4225 9175,4210 9195,4190 9195,4160 9190,4155 9125,4155 9110,4170
AVDD_3V3_FLOW on BOTTOM "BOTTOM-AVDD_3V3_FLOW 3" (solid, pour order 114): 7785,4815 7795,4825 7880,4825 7885,4820 7885,4465 7875,4455 7800,4455 7785,4470 7785,4815
GND on GND02 "GND02-GND" (solid, pour order 66): 225 vertices, not listed, extent 9450,4030 10405,5220
GND on GND02 "GND02-GND 1" (solid, pour order 92): 1045 vertices, not listed, extent 4025,4025 9396.25,5943.5
no net on PLACE_BOUND_TOP (solid): 7373.24,4609 ccw(c7324,4609) 7324,4658.24 ccw(c7324,4609) 7274.76,4609 ccw(c7324,4609) 7324,4559.76 ccw(c7324,4609) 7373.24,4609
no net on PLACE_BOUND_TOP (solid): 7373.24,5790 ccw(c7324,5790) 7324,5839.24 ccw(c7324,5790) 7274.76,5790 ccw(c7324,5790) 7324,5740.76 ccw(c7324,5790) 7373.24,5790
no net on PLACE_BOUND_TOP (solid): 6192.24,5790 ccw(c6143,5790) 6143,5839.24 ccw(c6143,5790) 6093.76,5790 ccw(c6143,5790) 6143,5740.76 ccw(c6143,5790) 6192.24,5790
no net on PLACE_BOUND_TOP (solid): 6192.24,4609 ccw(c6143,4609) 6143,4658.24 ccw(c6143,4609) 6093.76,4609 ccw(c6143,4609) 6143,4559.76 ccw(c6143,4609) 6192.24,4609
no net on PLACE_BOUND_TOP (solid): 4381.89,4137.8 ccw(c4295.27,4137.8) 4295.27,4224.4 ccw(c4295.27,4137.8) 4208.66,4137.8 ccw(c4295.27,4137.8) 4295.27,4051.18 ccw(c4295.27,4137.8) 4381.89,4137.8
no net on PLACE_BOUND_TOP (solid): 4381.89,5830.7 ccw(c4295.27,5830.7) 4295.27,5917.31 ccw(c4295.27,5830.7) 4208.66,5830.7 ccw(c4295.27,5830.7) 4295.27,5744.1 ccw(c4295.27,5830.7) 4381.89,5830.7
no net on PLACE_BOUND_TOP (solid): 8318.89,4137.8 ccw(c8232.27,4137.8) 8232.27,4224.4 ccw(c8232.27,4137.8) 8145.66,4137.8 ccw(c8232.27,4137.8) 8232.27,4051.18 ccw(c8232.27,4137.8) 8318.89,4137.8
no net on PLACE_BOUND_TOP (solid): 8318.89,5830.7 ccw(c8232.27,5830.7) 8232.27,5917.31 ccw(c8232.27,5830.7) 8145.66,5830.7 ccw(c8232.27,5830.7) 8232.27,5744.1 ccw(c8232.27,5830.7) 8318.89,5830.7

## Keep-outs
Multi-Layer:
  circle w1: c4295.27,4137.8 r86.61
  circle w1: c4295.27,5830.7 r86.61
  circle w1: c8232.27,4137.8 r86.61
  circle w1: c8232.27,5830.7 r86.61

## Other copper
TOP:
  pour cut-out: 8066.36,4275 8064.95,4285.7 8060.82,4295.68 8054.24,4304.24 8045.68,4310.82 8035.7,4314.95 8025,4316.36 8014.3,4314.95 8004.32,4310.82 7995.76,4304.24 7989.18,4295.68 7985.05,4285.7 7983.64,4275 7985.05,4264.3 7989.18,4254.32 7995.76,4245.76 8004.32,4239.18 8014.3,4235.05 8025,4233.64 8035.7,4235.05 8045.68,4239.18 8054.24,4245.76 8060.82,4254.32 8064.95,4264.3 8066.36,4275
  pour cut-out: 8510.3,5550 8509.1,5559.14 8505.57,5567.65 8499.96,5574.96 8492.65,5580.57 8484.14,5584.1 8475,5585.3 8465.86,5584.1 8457.35,5580.57 8450.04,5574.96 8444.43,5567.65 8440.9,5559.14 8439.7,5550 8440.9,5540.86 8444.43,5532.35 8450.04,5525.04 8457.35,5519.43 8465.86,5515.9 8475,5514.7 8484.14,5515.9 8492.65,5519.43 8499.96,5525.04 8505.57,5532.35 8509.1,5540.86 8510.3,5550
  pour cut-out: 9385.41,5485.58 9300.41,5485.58 9300.41,5577.58 9385.41,5577.58 9385.41,5485.58
  pour cut-out: 9219.8,5735.1 9217.4,5735.2 9215.02,5735.52 9212.68,5736.04 9210.39,5736.76 9208.18,5737.67 9206.05,5738.78 9204.03,5740.07 9202.12,5741.53 9200.35,5743.15 9198.73,5744.92 9197.27,5746.83 9195.98,5748.85 9194.87,5750.98 9193.96,5753.19 9193.24,5755.48 9192.72,5757.82 9192.4,5760.2 9192.3,5762.6 9192.4,5765 9192.72,5767.38 9193.24,5769.72 9193.96,5772.01 9194.87,5774.22 9195.98,5776.35 9197.27,5778.37 9198.73,5780.28 9200.35,5782.05 9202.12,5783.67 9204.03,5785.13 9206.05,5786.42 9208.18,5787.53 9210.39,5788.44 9212.68,5789.16 9215.02,5789.68 9217.4,5790 9219.8,5790.1 9229.8,5790.1 9232.2,5790 9234.58,5789.68 9236.92,5789.16 9239.21,5788.44 9241.42,5787.53 9243.55,5786.42 9245.57,5785.13 9247.48,5783.67 9249.25,5782.05 9250.87,5780.28 9252.33,5778.37 9253.62,5776.35 9254.73,5774.22 9255.64,5772.01 9256.36,5769.72 9256.88,5767.38 9257.2,5765 9257.3,5762.6 9257.2,5760.2 9256.88,5757.82 9256.36,5755.48 9255.64,5753.19 9254.73,5750.98 9253.62,5748.85 9252.33,5746.83 9250.87,5744.92 9249.25,5743.15 9247.48,5741.53 9245.57,5740.07 9243.55,5738.78 9241.42,5737.67 9239.21,5736.76 9236.92,5736.04 9234.58,5735.52 9232.2,5735.2 9229.8,5735.1 9219.8,5735.1
  pour cut-out: 9762.34,4310 9761.02,4316.63 9757.26,4322.26 9751.63,4326.02 9745,4327.34 9738.37,4326.02 9732.74,4322.26 9728.98,4316.63 9727.66,4310 9728.98,4303.37 9732.74,4297.74 9738.37,4293.98 9745,4292.66 9751.63,4293.98 9757.26,4297.74 9761.02,4303.37 9762.34,4310
GND02:
  drawing of 302 lines, arcs and shapes, not listed
PWR03:
  drawing of 186 lines, arcs and shapes, not listed
BOTTOM:
  pour cut-out: 9267.34,4625 9266.02,4631.63 9262.26,4637.26 9256.63,4641.02 9250,4642.34 9243.37,4641.02 9237.74,4637.26 9233.98,4631.63 9232.66,4625 9233.98,4618.37 9237.74,4612.74 9243.37,4608.98 9250,4607.66 9256.63,4608.98 9262.26,4612.74 9266.02,4618.37 9267.34,4625
  pour cut-out: 7984,4416 8066,4416 8066,4334 7984,4334 7984,4416
  pour cut-out: 8066.36,4275 8064.95,4285.7 8060.82,4295.68 8054.24,4304.24 8045.68,4310.82 8035.7,4314.95 8025,4316.36 8014.3,4314.95 8004.32,4310.82 7995.76,4304.24 7989.18,4295.68 7985.05,4285.7 7983.64,4275 7985.05,4264.3 7989.18,4254.32 7995.76,4245.76 8004.32,4239.18 8014.3,4235.05 8025,4233.64 8035.7,4235.05 8045.68,4239.18 8054.24,4245.76 8060.82,4254.32 8064.95,4264.3 8066.36,4275
  pour cut-out: 7966.36,4375 7964.95,4385.7 7960.82,4395.68 7954.24,4404.24 7945.68,4410.82 7935.7,4414.95 7925,4416.36 7914.3,4414.95 7904.32,4410.82 7895.76,4404.24 7889.18,4395.68 7885.05,4385.7 7883.64,4375 7885.05,4364.3 7889.18,4354.32 7895.76,4345.76 7904.32,4339.18 7914.3,4335.05 7925,4333.64 7935.7,4335.05 7945.68,4339.18 7954.24,4345.76 7960.82,4354.32 7964.95,4364.3 7966.36,4375
  pour cut-out: 7866.36,4375 7864.95,4385.7 7860.82,4395.68 7854.24,4404.24 7845.68,4410.82 7835.7,4414.95 7825,4416.36 7814.3,4414.95 7804.32,4410.82 7795.76,4404.24 7789.18,4395.68 7785.05,4385.7 7783.64,4375 7785.05,4364.3 7789.18,4354.32 7795.76,4345.76 7804.32,4339.18 7814.3,4335.05 7825,4333.64 7835.7,4335.05 7845.68,4339.18 7854.24,4345.76 7860.82,4354.32 7864.95,4364.3 7866.36,4375
  pour cut-out: 7966.36,4275 7964.95,4285.7 7960.82,4295.68 7954.24,4304.24 7945.68,4310.82 7935.7,4314.95 7925,4316.36 7914.3,4314.95 7904.32,4310.82 7895.76,4304.24 7889.18,4295.68 7885.05,4285.7 7883.64,4275 7885.05,4264.3 7889.18,4254.32 7895.76,4245.76 7904.32,4239.18 7914.3,4235.05 7925,4233.64 7935.7,4235.05 7945.68,4239.18 7954.24,4245.76 7960.82,4254.32 7964.95,4264.3 7966.36,4275
  pour cut-out: 7866.36,4275 7864.95,4285.7 7860.82,4295.68 7854.24,4304.24 7845.68,4310.82 7835.7,4314.95 7825,4316.36 7814.3,4314.95 7804.32,4310.82 7795.76,4304.24 7789.18,4295.68 7785.05,4285.7 7783.64,4275 7785.05,4264.3 7789.18,4254.32 7795.76,4245.76 7804.32,4239.18 7814.3,4235.05 7825,4233.64 7835.7,4235.05 7845.68,4239.18 7854.24,4245.76 7860.82,4254.32 7864.95,4264.3 7866.36,4275
  pour cut-out: 7616.16,4273.82 7614.84,4280.45 7611.08,4286.08 7605.45,4289.84 7598.82,4291.16 7592.19,4289.84 7586.56,4286.08 7582.8,4280.45 7581.48,4273.82 7582.8,4267.19 7586.56,4261.56 7592.19,4257.8 7598.82,4256.48 7605.45,4257.8 7611.08,4261.56 7614.84,4267.19 7616.16,4273.82
  pour cut-out: 7468.34,4274 7467.02,4280.63 7463.26,4286.26 7457.63,4290.02 7451,4291.34 7444.37,4290.02 7438.74,4286.26 7434.98,4280.63 7433.66,4274 7434.98,4267.37 7438.74,4261.74 7444.37,4257.98 7451,4256.66 7457.63,4257.98 7463.26,4261.74 7467.02,4267.37 7468.34,4274
  pour cut-out: 7217.34,4300 7216.02,4306.63 7212.26,4312.26 7206.63,4316.02 7200,4317.34 7193.37,4316.02 7187.74,4312.26 7183.98,4306.63 7182.66,4300 7183.98,4293.37 7187.74,4287.74 7193.37,4283.98 7200,4282.66 7206.63,4283.98 7212.26,4287.74 7216.02,4293.37 7217.34,4300
  pour cut-out: 6993.34,4274 6992.02,4280.63 6988.26,4286.26 6982.63,4290.02 6976,4291.34 6969.37,4290.02 6963.74,4286.26 6959.98,4280.63 6958.66,4274 6959.98,4267.37 6963.74,4261.74 6969.37,4257.98 6976,4256.66 6982.63,4257.98 6988.26,4261.74 6992.02,4267.37 6993.34,4274
  pour cut-out: 6767.34,4300 6766.02,4306.63 6762.26,4312.26 6756.63,4316.02 6750,4317.34 6743.37,4316.02 6737.74,4312.26 6733.98,4306.63 6732.66,4300 6733.98,4293.37 6737.74,4287.74 6743.37,4283.98 6750,4282.66 6756.63,4283.98 6762.26,4287.74 6766.02,4293.37 6767.34,4300
  pour cut-out: 6543.34,4274 6542.02,4280.63 6538.26,4286.26 6532.63,4290.02 6526,4291.34 6519.37,4290.02 6513.74,4286.26 6509.98,4280.63 6508.66,4274 6509.98,4267.37 6513.74,4261.74 6519.37,4257.98 6526,4256.66 6532.63,4257.98 6538.26,4261.74 6542.02,4267.37 6543.34,4274
  pour cut-out: 6317.34,4300 6316.02,4306.63 6312.26,4312.26 6306.63,4316.02 6300,4317.34 6293.37,4316.02 6287.74,4312.26 6283.98,4306.63 6282.66,4300 6283.98,4293.37 6287.74,4287.74 6293.37,4283.98 6300,4282.66 6306.63,4283.98 6312.26,4287.74 6316.02,4293.37 6317.34,4300
  pour cut-out: 6093.34,4274 6092.02,4280.63 6088.26,4286.26 6082.63,4290.02 6076,4291.34 6069.37,4290.02 6063.74,4286.26 6059.98,4280.63 6058.66,4274 6059.98,4267.37 6063.74,4261.74 6069.37,4257.98 6076,4256.66 6082.63,4257.98 6088.26,4261.74 6092.02,4267.37 6093.34,4274
  pour cut-out: 8742.34,5350 8741.02,5356.63 8737.26,5362.26 8731.63,5366.02 8725,5367.34 8718.37,5366.02 8712.74,5362.26 8708.98,5356.63 8707.66,5350 8708.98,5343.37 8712.74,5337.74 8718.37,5333.98 8725,5332.66 8731.63,5333.98 8737.26,5337.74 8741.02,5343.37 8742.34,5350
  pour cut-out: 8742.34,5400 8741.02,5406.63 8737.26,5412.26 8731.63,5416.02 8725,5417.34 8718.37,5416.02 8712.74,5412.26 8708.98,5406.63 8707.66,5400 8708.98,5393.37 8712.74,5387.74 8718.37,5383.98 8725,5382.66 8731.63,5383.98 8737.26,5387.74 8741.02,5393.37 8742.34,5400
  pour cut-out: 4592.34,5400 4591.02,5406.63 4587.26,5412.26 4581.63,5416.02 4575,5417.34 4568.37,5416.02 4562.74,5412.26 4558.98,5406.63 4557.66,5400 4558.98,5393.37 4562.74,5387.74 4568.37,5383.98 4575,5382.66 4581.63,5383.98 4587.26,5387.74 4591.02,5393.37 4592.34,5400
  pour cut-out: 5840,5835 5910,5835 5910,5765 5840,5765 5840,5835
  pour cut-out: 4397.46,4137.8 4395.5,4157.73 4389.69,4176.9 4380.24,4194.57 4367.53,4210.05 4352.05,4222.76 4334.38,4232.21 4315.21,4238.02 4295.27,4239.98 4275.34,4238.02 4256.17,4232.21 4238.5,4222.76 4223.02,4210.05 4210.31,4194.57 4200.86,4176.9 4195.05,4157.73 4193.09,4137.8 4195.05,4117.86 4200.86,4098.69 4210.31,4081.02 4223.02,4065.54 4238.5,4052.83 4256.17,4043.38 4275.34,4037.57 4295.27,4035.61 4315.21,4037.57 4334.38,4043.38 4352.05,4052.83 4367.53,4065.54 4380.24,4081.02 4389.69,4098.69 4395.5,4117.86 4397.46,4137.8
  pour cut-out: 4270.37,4700 4268.89,4718.83 4264.48,4737.2 4257.25,4754.65 4247.38,4770.75 4235.12,4785.12 4220.75,4797.38 4204.65,4807.25 4187.2,4814.48 4168.83,4818.89 4150,4820.37 4131.17,4818.89 4112.8,4814.48 4095.35,4807.25 4079.25,4797.38 4064.88,4785.12 4052.62,4770.75 4042.75,4754.65 4035.52,4737.2 4031.11,4718.83 4029.63,4700 4031.11,4681.17 4035.52,4662.8 4042.75,4645.35 4052.62,4629.25 4064.88,4614.88 4079.25,4602.62 4095.35,4592.75 4112.8,4585.52 4131.17,4581.11 4150,4579.63 4168.83,4581.11 4187.2,4585.52 4204.65,4592.75 4220.75,4602.62 4235.12,4614.88 4247.38,4629.25 4257.25,4645.35 4264.48,4662.8 4268.89,4681.17 4270.37,4700
  pour cut-out: 4270.37,5000 4268.89,5018.83 4264.48,5037.2 4257.25,5054.65 4247.38,5070.75 4235.12,5085.12 4220.75,5097.38 4204.65,5107.25 4187.2,5114.48 4168.83,5118.89 4150,5120.37 4131.17,5118.89 4112.8,5114.48 4095.35,5107.25 4079.25,5097.38 4064.88,5085.12 4052.62,5070.75 4042.75,5054.65 4035.52,5037.2 4031.11,5018.83 4029.63,5000 4031.11,4981.17 4035.52,4962.8 4042.75,4945.35 4052.62,4929.25 4064.88,4914.88 4079.25,4902.62 4095.35,4892.75 4112.8,4885.52 4131.17,4881.11 4150,4879.63 4168.83,4881.11 4187.2,4885.52 4204.65,4892.75 4220.75,4902.62 4235.12,4914.88 4247.38,4929.25 4257.25,4945.35 4264.48,4962.8 4268.89,4981.17 4270.37,5000
  pour cut-out: 4397.46,5830.7 4395.5,5850.64 4389.69,5869.81 4380.24,5887.48 4367.53,5902.96 4352.05,5915.67 4334.38,5925.12 4315.21,5930.93 4295.27,5932.89 4275.34,5930.93 4256.17,5925.12 4238.5,5915.67 4223.02,5902.96 4210.31,5887.48 4200.86,5869.81 4195.05,5850.64 4193.09,5830.7 4195.05,5810.77 4200.86,5791.6 4210.31,5773.93 4223.02,5758.45 4238.5,5745.74 4256.17,5736.29 4275.34,5730.48 4295.27,5728.52 4315.21,5730.48 4334.38,5736.29 4352.05,5745.74 4367.53,5758.45 4380.24,5773.93 4389.69,5791.6 4395.5,5810.77 4397.46,5830.7
  pour cut-out: 4667.73,5814.61 4666.41,5821.24 4662.65,5826.87 4657.02,5830.63 4650.39,5831.95 4643.76,5830.63 4638.13,5826.87 4634.37,5821.24 4633.05,5814.61 4634.37,5807.98 4638.13,5802.35 4643.76,5798.59 4650.39,5797.27 4657.02,5798.59 4662.65,5802.35 4666.41,5807.98 4667.73,5814.61
  pour cut-out: 8334.46,4137.8 8332.5,4157.73 8326.69,4176.9 8317.24,4194.57 8304.53,4210.05 8289.05,4222.76 8271.38,4232.21 8252.21,4238.02 8232.27,4239.98 8212.34,4238.02 8193.17,4232.21 8175.5,4222.76 8160.02,4210.05 8147.31,4194.57 8137.86,4176.9 8132.05,4157.73 8130.09,4137.8 8132.05,4117.86 8137.86,4098.69 8147.31,4081.02 8160.02,4065.54 8175.5,4052.83 8193.17,4043.38 8212.34,4037.57 8232.27,4035.61 8252.21,4037.57 8271.38,4043.38 8289.05,4052.83 8304.53,4065.54 8317.24,4081.02 8326.69,4098.69 8332.5,4117.86 8334.46,4137.8
  pour cut-out: 8334.46,5830.7 8332.5,5850.64 8326.69,5869.81 8317.24,5887.48 8304.53,5902.96 8289.05,5915.67 8271.38,5925.12 8252.21,5930.93 8232.27,5932.89 8212.34,5930.93 8193.17,5925.12 8175.5,5915.67 8160.02,5902.96 8147.31,5887.48 8137.86,5869.81 8132.05,5850.64 8130.09,5830.7 8132.05,5810.77 8137.86,5791.6 8147.31,5773.93 8160.02,5758.45 8175.5,5745.74 8193.17,5736.29 8212.34,5730.48 8232.27,5728.52 8252.21,5730.48 8271.38,5736.29 8289.05,5745.74 8304.53,5758.45 8317.24,5773.93 8326.69,5791.6 8332.5,5810.77 8334.46,5830.7

## Silkscreen, mask and mechanical layers (free items; w line width, h text height)
Top Overlay:
  circle w6: c7324,4609 r52.2
  circle w6: c7324,5790 r52.2
  circle w6: c6143,5790 r52.2
  circle w6: c6143,4609 r52.2
  circle w6.02: c4295.27,4137.8 r90.55
  circle w6.02: c4295.27,5830.7 r90.55
  circle w6.02: c8232.27,4137.8 r90.55
  circle w6.02: c8232.27,5830.7 r90.55
  lines w1: 5983.55,4449.55 7483.55,4449.55 7483.55,5949.55 5983.55,5949.55 5983.55,4449.55
  lines w6: 4355,4305 4395,4305 ; 4355,4610 4395,4610 ; 4355,5235 4395,5235 ; 4375,4285 4375,4320 ; 4375,4590 4375,4625 ; 4375,5215 4375,5250 ; 4455,4305 4495,4305 ; 4455,4610 4495,4610 ; 4455,4930 4495,4930 ; 4460,5235 4500,5235 ; 4475,4285 4475,4320 ; 4475,4590 4475,4625 ; 4475,4910 4475,4945 ; 4480,5215 4480,5250 ; 4535,5545 4575,5545 ; 4555,5525 4555,5560 ; 8550,5260 8590,5260 ; 8570,5240 8570,5275 ; 8860,5305 8900,5305 ; 8880,5285 8880,5320
  text "DEV" at 4050,6050 h51
  text "DEV" at 8550,5825 h51
  text "N" at 5660,5705 h30
  text "P" at 5760,5705 h30
  text "DEV" at 4050,4400 h51
OUTLINE:
  lines w1: 4000,4000 4000,5968.5 8921.25,5968.5 8921.25,5768.5 9075,5768.5 9075,5868.5 9421.25,5868.5 9421.25,4100 9075,4100 9075,4200 8921.25,4200 8921.25,4000 4000,4000 ; 9425,4000 9425,5250 10425,5250 10425,4000 9425,4000
DRAWING_ORIGIN:
  lines w1: 3975,4000 4025,4000 ; 4000,3975 4000,4025
PIN_NUMBER:
  text "1" at 4117,5850 h20
  text "1" at 4285.27,5830.7 h25
  text "1" at 8222.27,5830.7 h25
  text "1" at 6133,5790 h25
  text "1" at 7314,5790 h25
  text "1" at 8617,5625 h20
  text "1" at 6133,4609 h25
  text "1" at 7314,4609 h25
  text "1" at 4117,4200 h20
  text "1" at 4285.27,4137.8 h25
  text "1" at 8222.27,4137.8 h25
PLACE_BOUND_TOP:
  region: 8605,5605 8645,5605 8645,5645 8605,5645
  region: 4105,5830 4145,5830 4145,5870 4105,5870
  region: 4105,4180 4145,4180 4145,4220 4105,4220
ASSEMBLY_TOP:
  text "H*" at 6143,5890 h25
  text "H*" at 7324,5890 h25
  text "H*" at 6143,4709 h25
  text "H*" at 7324,4709 h25

## Text inside footprints (layer, text, board x,y; h text height)
C1: PIN_NUMBER "1" at 4240,4431 h25 r270; PIN_NUMBER "2" at 4240,4469 h25 r270
C2: PIN_NUMBER "1" at 4465,4667.91 h25 r90; PIN_NUMBER "2" at 4465,4783 h25 r90
C3: PIN_NUMBER "1" at 4365,4667.91 h25 r90; PIN_NUMBER "2" at 4365,4783 h25 r90
C4: PIN_NUMBER "1" at 4565,4706 h25 r90; PIN_NUMBER "2" at 4565,4744 h25 r90
C5: PIN_NUMBER "2" at 4984,4650 h25; PIN_NUMBER "1" at 4946,4650 h25
C6: PIN_NUMBER "1" at 4365,4367.91 h25 r90; PIN_NUMBER "2" at 4365,4483 h25 r90
C7: PIN_NUMBER "1" at 4465,4367.91 h25 r90; PIN_NUMBER "2" at 4465,4483 h25 r90
C8: PIN_NUMBER "1" at 4465,4406 h25 r270; PIN_NUMBER "2" at 4465,4444 h25 r270
C9: PIN_NUMBER "1" at 4365,5292.91 h25 r90; PIN_NUMBER "2" at 4365,5408 h25 r90
C10: PIN_NUMBER "1" at 4465,5292.91 h25 r90; PIN_NUMBER "2" at 4465,5408 h25 r90
C11: PIN_NUMBER "1" at 4565,5331 h25 r90; PIN_NUMBER "2" at 4565,5369 h25 r90
C12: PIN_NUMBER "1" at 4434,5675 h25; PIN_NUMBER "2" at 4396,5675 h25
C13: PIN_NUMBER "2" at 4984,5275 h25; PIN_NUMBER "1" at 4946,5275 h25
C14: PIN_NUMBER "1" at 4465,4992.91 h25 r90; PIN_NUMBER "2" at 4465,5108 h25 r90
C15: PIN_NUMBER "1" at 4465,5542.91 h25 r90; PIN_NUMBER "2" at 4465,5658 h25 r90
C16: PIN_NUMBER "1" at 4465,5031 h25 r270; PIN_NUMBER "2" at 4465,5069 h25 r270
C17: PIN_NUMBER "1" at 10105,4546 h25 r270; PIN_NUMBER "2" at 10105,4584 h25 r270
C18: PIN_NUMBER "1" at 10180,4854 h25 r90; PIN_NUMBER "2" at 10180,4816 h25 r90
C19: PIN_NUMBER "1" at 9915,4541 h25 r270; PIN_NUMBER "2" at 9915,4579 h25 r270
C20: PIN_NUMBER "2" at 7909,4700 h25 r180; PIN_NUMBER "1" at 7871,4700 h25 r180
C21: PIN_NUMBER "2" at 7909,4750 h25 r180; PIN_NUMBER "1" at 7871,4750 h25 r180
C22: PIN_NUMBER "2" at 7909,4800 h25 r180; PIN_NUMBER "1" at 7871,4800 h25 r180
C23: PIN_NUMBER "1" at 9709,4925 h25; PIN_NUMBER "2" at 9671,4925 h25
C24: PIN_NUMBER "1" at 9234,5350 h25 r180; PIN_NUMBER "2" at 9196,5350 h25 r180
C25: PIN_NUMBER "1" at 9234,5400 h25 r180; PIN_NUMBER "2" at 9196,5400 h25 r180
C26: PIN_NUMBER "1" at 8846,4650 h25 r180; PIN_NUMBER "2" at 8884,4650 h25 r180
C27: PIN_NUMBER "1" at 8784,4650 h25; PIN_NUMBER "2" at 8746,4650 h25
C28: PIN_NUMBER "1" at 7790,4969 h25 r270; PIN_NUMBER "2" at 7790,4931 h25 r270
C29: PIN_NUMBER "2" at 7790,5021 h25 r270; PIN_NUMBER "1" at 7790,5059 h25 r270
C30: PIN_NUMBER "1" at 7709,4875 h25 r180; PIN_NUMBER "2" at 7671,4875 h25 r180
C31: PIN_NUMBER "2" at 8409,5170 h25 r180; PIN_NUMBER "1" at 8371,5170 h25 r180
C32: PIN_NUMBER "2" at 8415,4694 h25 r270; PIN_NUMBER "1" at 8415,4656 h25 r270
C33: PIN_NUMBER "2" at 7909,4550 h25 r180; PIN_NUMBER "1" at 7871,4550 h25 r180
C34: PIN_NUMBER "2" at 7909,4600 h25 r180; PIN_NUMBER "1" at 7871,4600 h25 r180
C35: PIN_NUMBER "2" at 7909,4650 h25 r180; PIN_NUMBER "1" at 7871,4650 h25 r180
C36: PIN_NUMBER "1" at 8715,5219 h25 r270; PIN_NUMBER "2" at 8715,5181 h25 r270
C37: PIN_NUMBER "1" at 8640,5257.09 h25 r270; PIN_NUMBER "2" at 8640,5142 h25 r270
C38: PIN_NUMBER "1" at 8915,5219 h25 r270; PIN_NUMBER "2" at 8915,5181 h25 r270
C39: PIN_NUMBER "1" at 8872.09,5375 h25 r180; PIN_NUMBER "2" at 8757,5375 h25 r180
C40: PIN_NUMBER "2" at 7909,4850 h25 r180; PIN_NUMBER "1" at 7871,4850 h25 r180
C41: PIN_NUMBER "2" at 7965,5294 h25 r270; PIN_NUMBER "1" at 7965,5256 h25 r270
C42: PIN_NUMBER "2" at 8509,5200 h25 r180; PIN_NUMBER "1" at 8471,5200 h25 r180
C43: PIN_NUMBER "2" at 8015,4656 h25 r90; PIN_NUMBER "1" at 8015,4694 h25 r90
C44: PIN_NUMBER "2" at 7871,5025 h25; PIN_NUMBER "1" at 7909,5025 h25